# Altium PCB Strommessplatine.PcbDoc
Units mm, origin at the board's own origin, x right, y up, seen from the top; angles counter-clockwise.
Board outline 98 x 97 mm, 2 copper layers (Top Layer, Bottom Layer), stack 1.605 mm thick; 91 components, 55 nets, 253 pads, 53 vias.
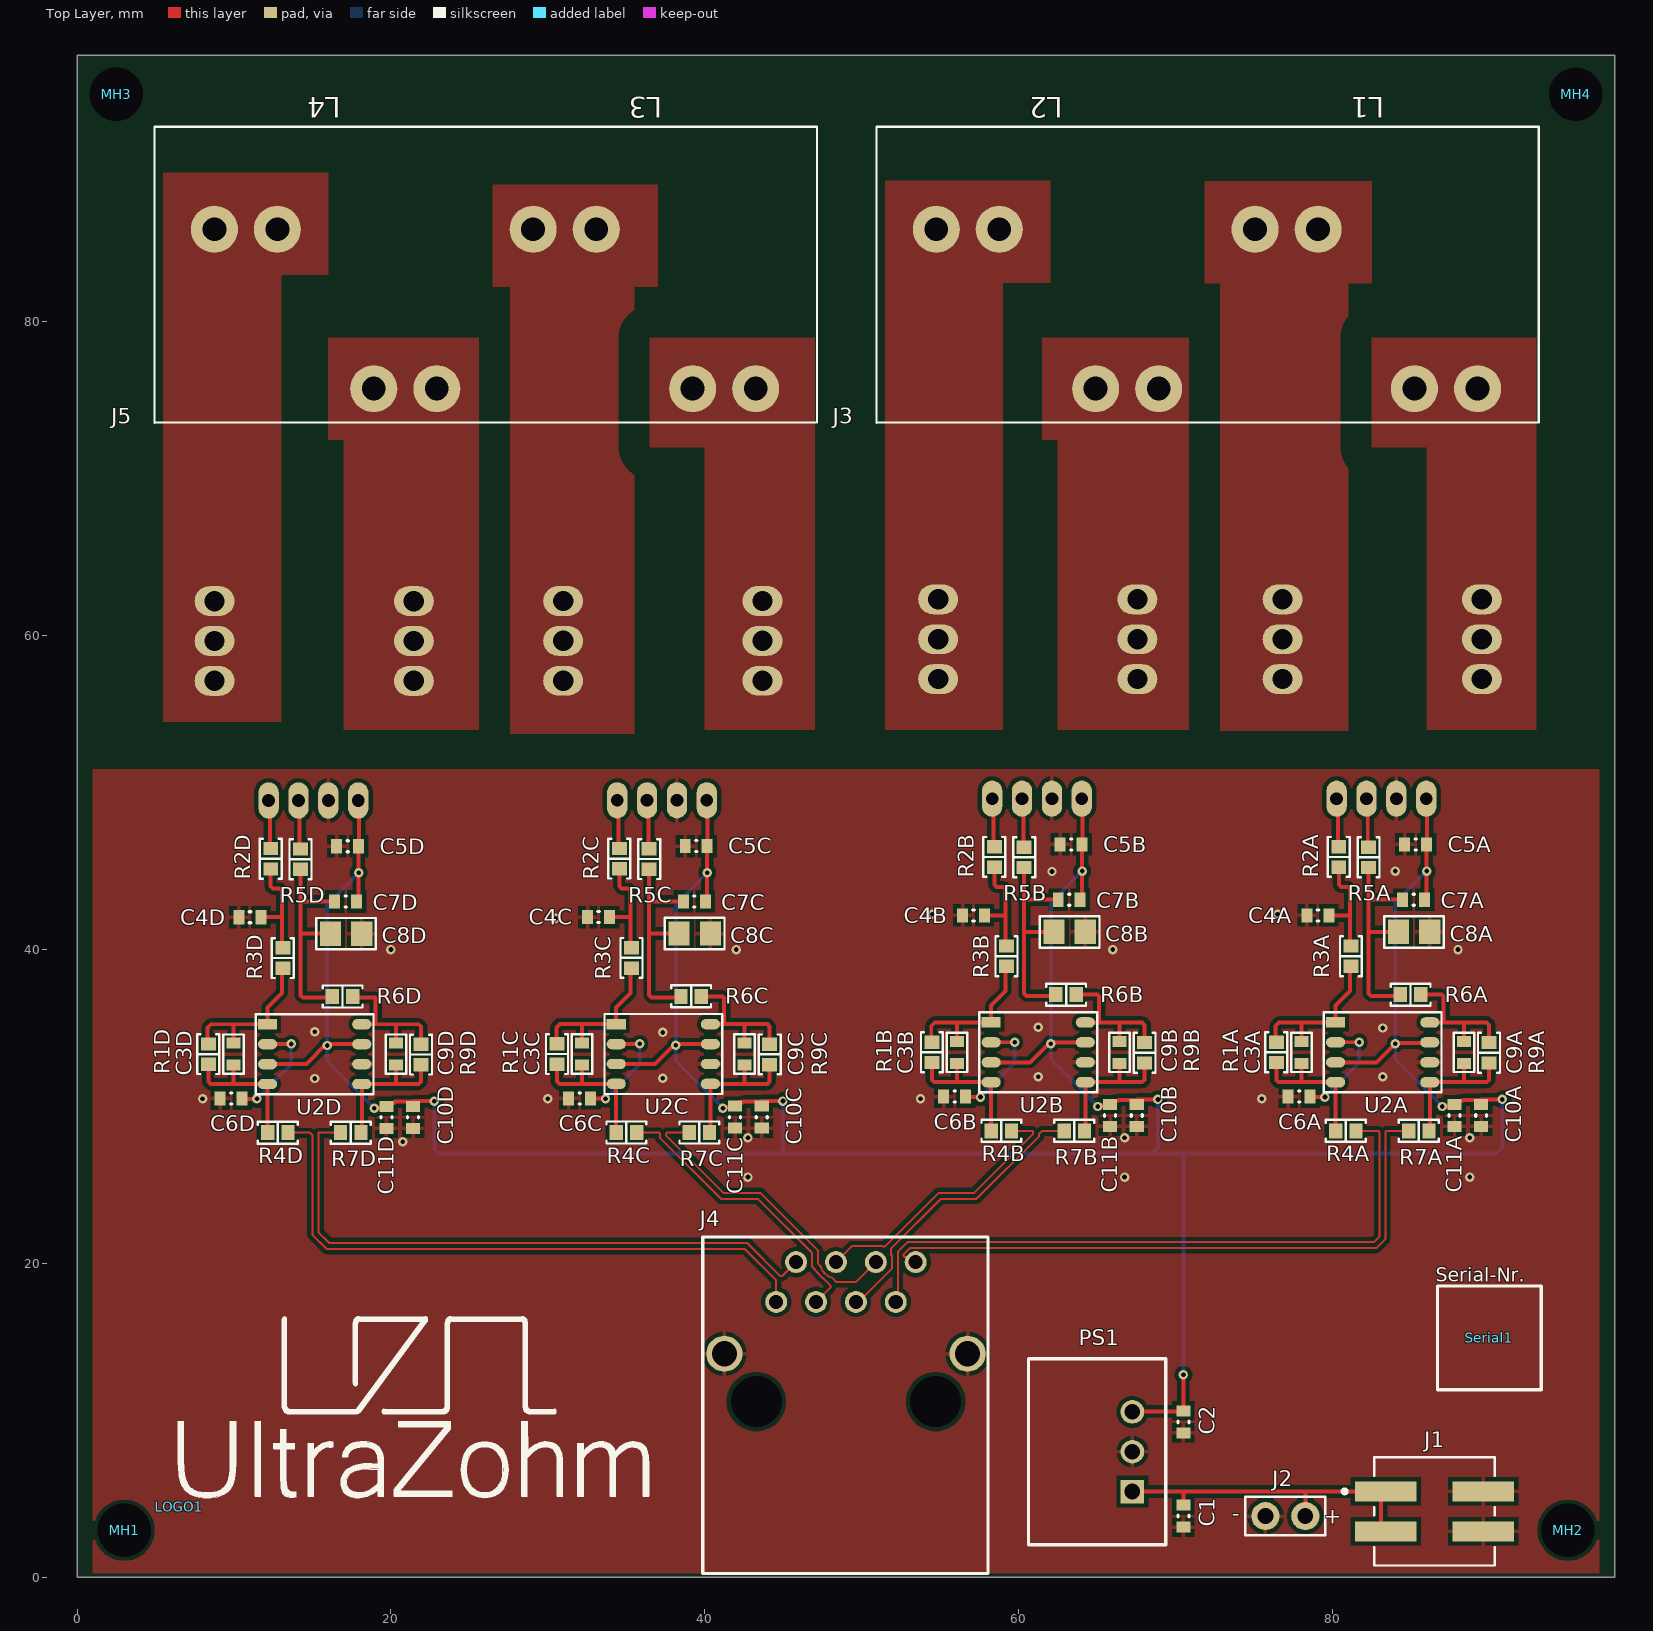
[diagram p0: Top Layer view]
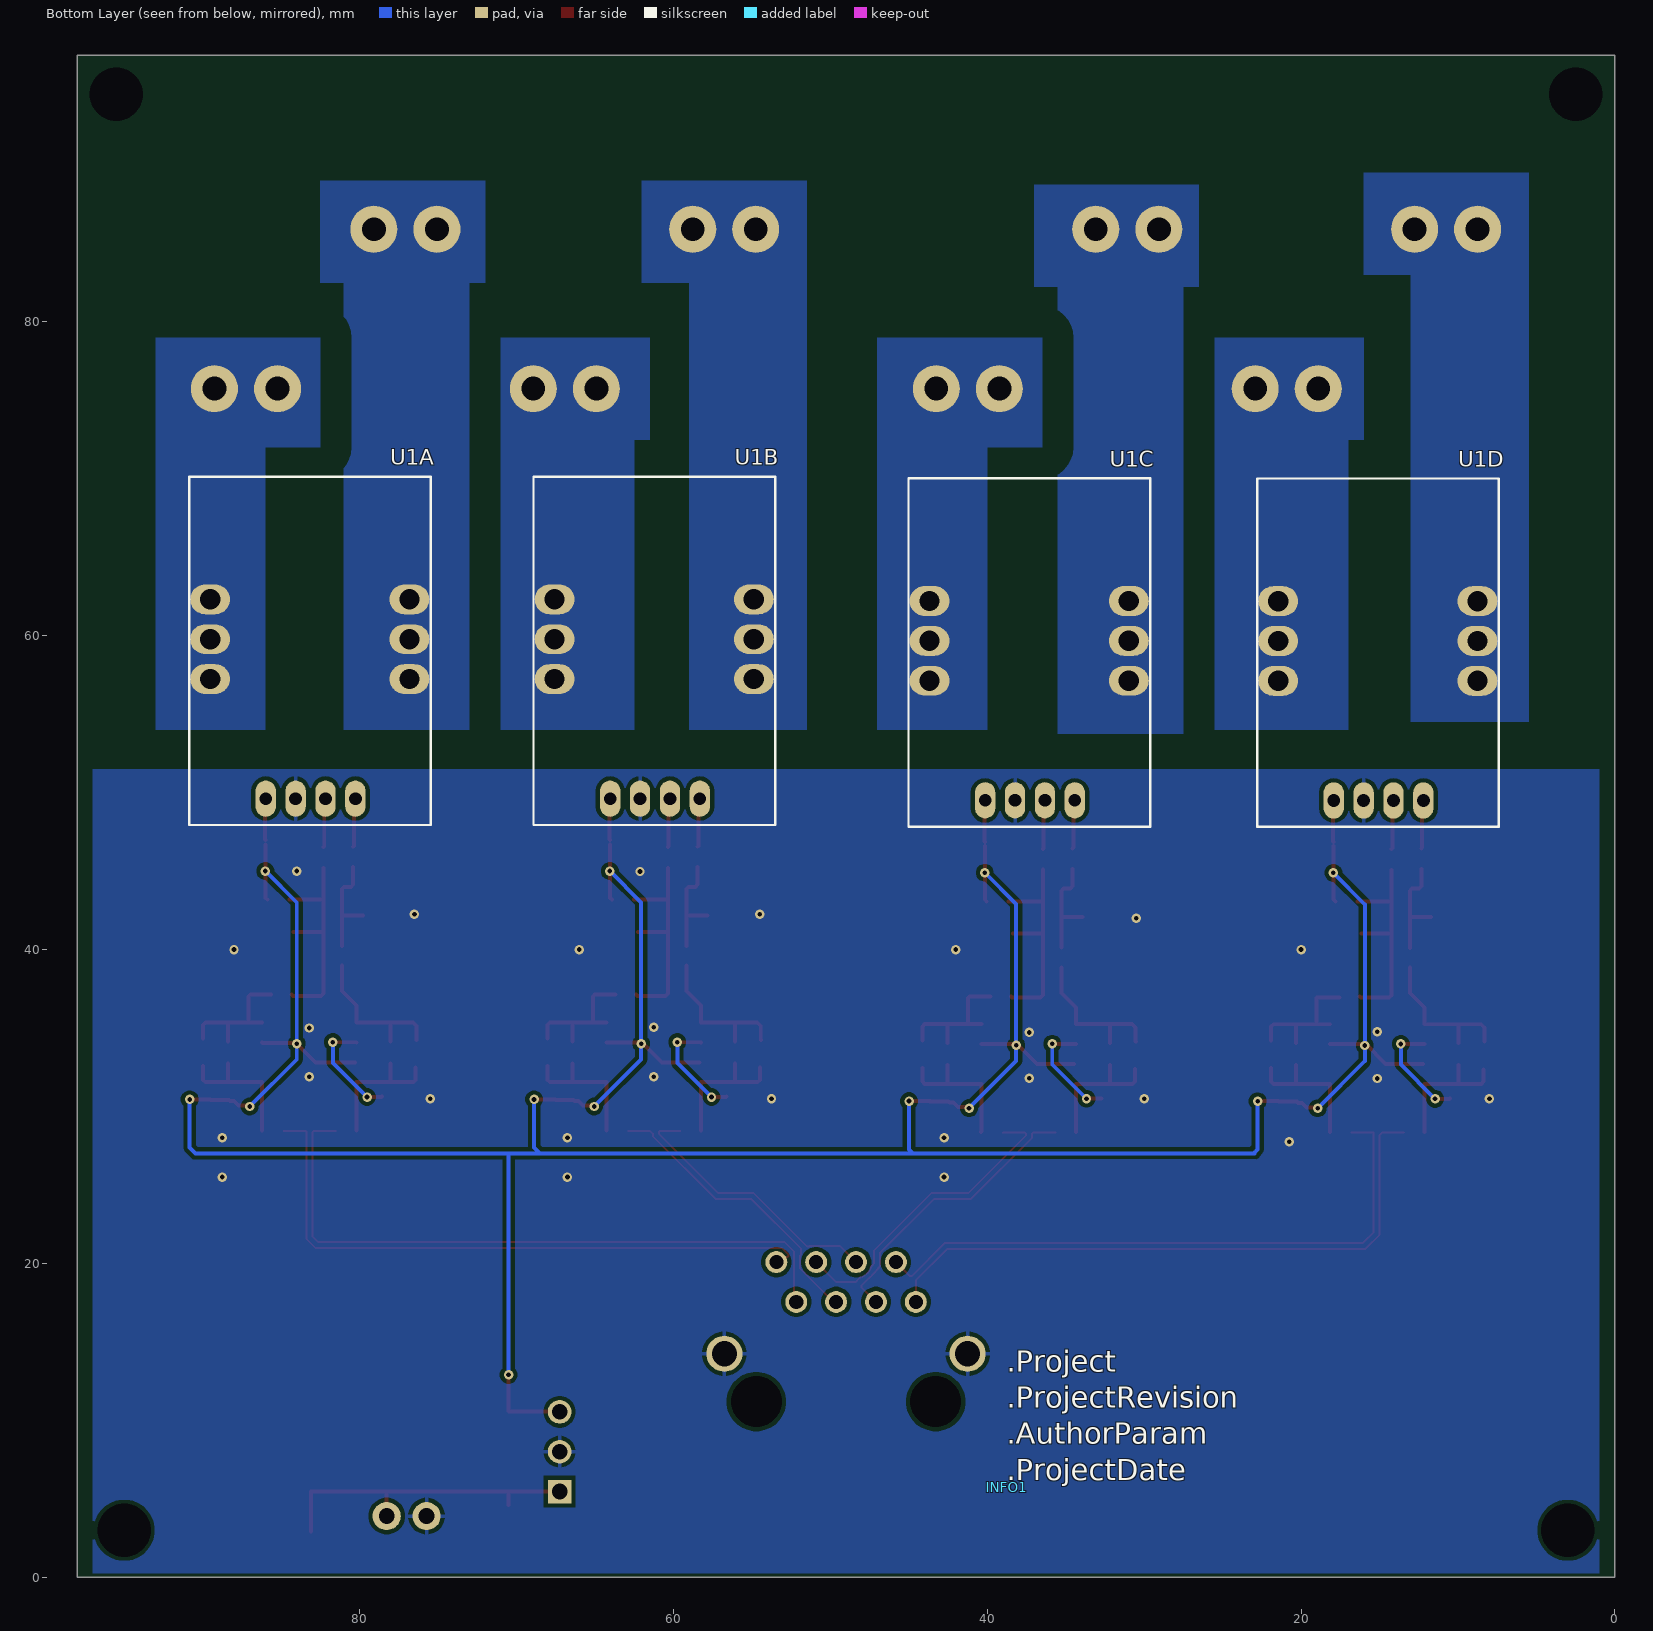
[diagram p1: Bottom Layer view, seen from below]
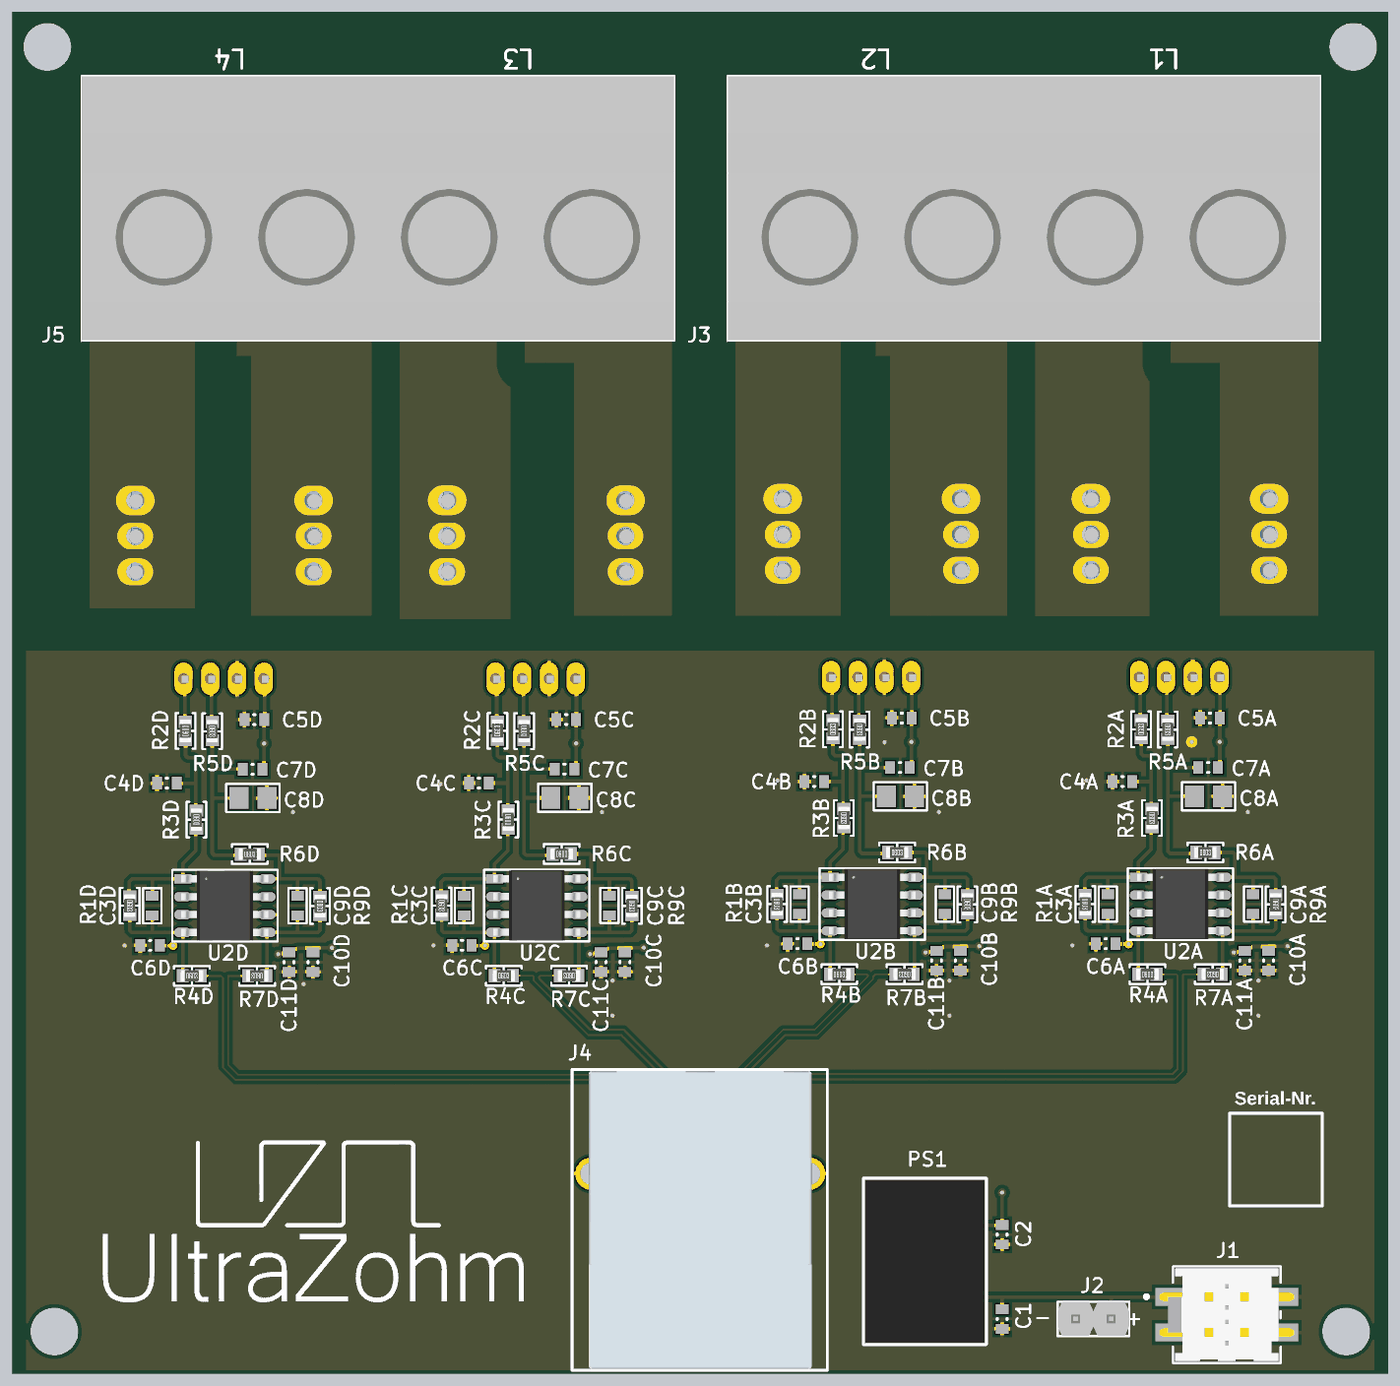
[diagram p2: 3D render of the assembled board from above, using the file's embedded part models]
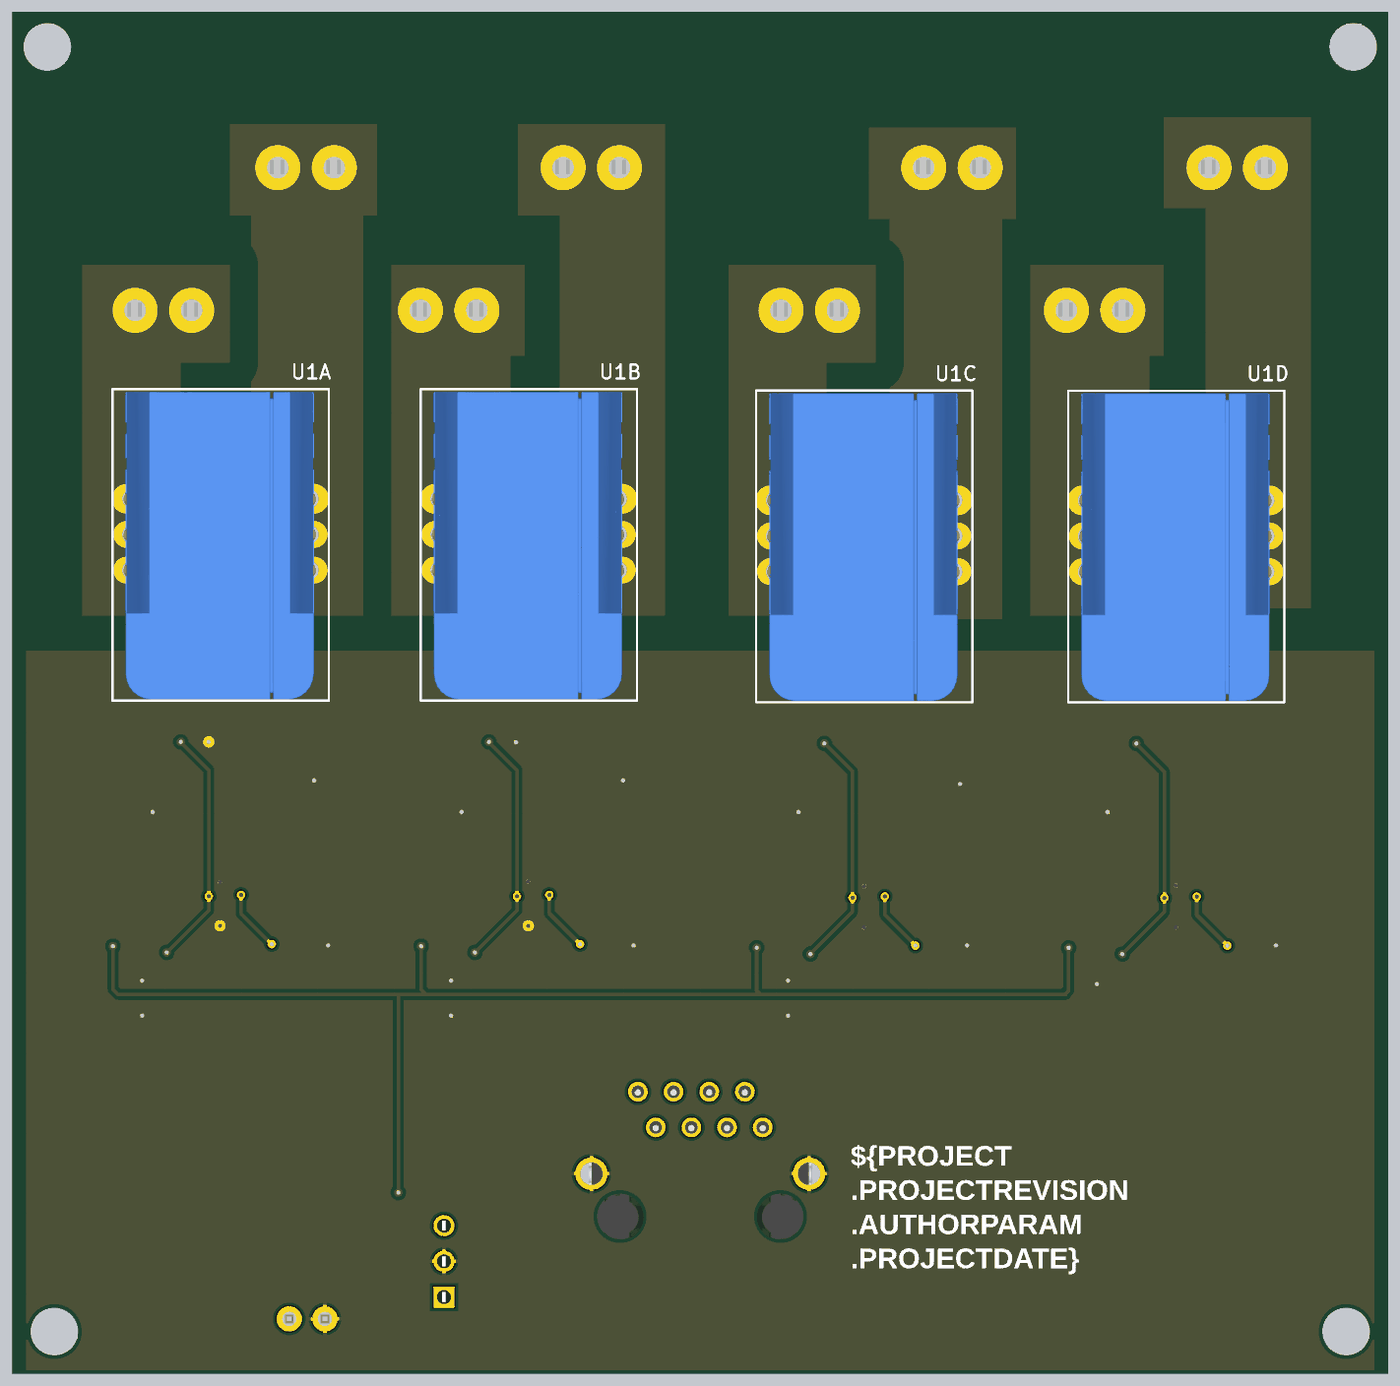
[diagram p3: 3D render of the assembled board from below, using the file's embedded part models]

## Layer stack, top to bottom
Top Solder: solder mask 0.01, Solder Resist, Dk 3.5
Top Layer: signal copper 0.07
Dielectric 1: prepreg 0.1, 2313, Dk 4.3
Core: core 1.265, Kern FR4, Dk 4.3
Dielectric 2: prepreg 0.1, 2313, Dk 4.3
Bottom Layer: signal copper 0.07
Bottom Solder: solder mask 0.01, Solder Resist, Dk 3.5

## Board outline
0,0 0,97 98,97 98,0

## Design rules (kind name [scope] priority, off if disabled: settings)
BoardOutlineClearance [All] p1: gap=0.254 ignorepadtopadclearanceinfootprint=FALSE except(0: Arc-SplitContinuation Track-SplitContinuation SMDPad-SplitContinuation THPad-SplitContinuation Via-SplitContinuation Fill-SplitContinuation Poly-SplitContinuation Region-SplitContinuation Text-SplitContinuation)
Clearance Clearance_Power [InNetClass('Power')] p1: gap=2 ignorepadtopadclearanceinfootprint=FALSE
Clearance Clearance_1 [All] p2: gap=0.254 ignorepadtopadclearanceinfootprint=FALSE except(0: Arc-Hole Track-Hole SMDPad-Hole THPad-Hole Via-Hole Fill-Hole Poly-Hole Region-Hole Text-Hole; 0.127: Arc-Arc Arc-Track Track-Track)
DiffPairsRouting [All] p1: maxlimit=0.254 minlimit=0.127 mostfreqgap=0.254 toplayer_minwidth=0.127 toplayer_maxwidth=0.127 toplayer_prefwidth=0.127 bottomlayer_minwidth=0.127 bottomlayer_maxwidth=0.127 bottomlayer_prefwidth=0.127 maxuncoupledlength=12.7
Height [All] p1: minheight=0 maxheight=40 prefheight=12.7
PolygonConnect PolygonConnect_Power [InNetClass('Power')] p1: connectstyle=Direct reliefconductorwidth=0.254 reliefentries=4 polygonreliefangle="90 Angle" airgapwidth=0.254
PolygonConnect [All] p2: thpad.connectstyle=Relief thpad.reliefconductorwidth=0.254 thpad.reliefentries=4 thpad.polygonreliefangle="90 Angle" thpad.airgapwidth=0.254 smdpad.connectstyle=Relief smdpad.reliefconductorwidth=0.254 smdpad.reliefentries=4 smdpad.polygonreliefangle="90 Angle" smdpad.airgapwidth=0.254 via.connectstyle=Direct via.reliefconductorwidth=0.254 via.reliefentries=4 via.polygonreliefangle="90 Angle" via.airgapwidth=0.254
RoomDefinition CurrentMeasuerment_2 [InComponentClass('CurrentMeasuerment_2')] p1: confinementstyle=ConfineIn formatcopy=TRUE lockcomponents=FALSE outline 51,24 70.8,24 70.8,72.625 51,72.625
RoomDefinition CurrentMeasuerment_4 [InComponentClass('CurrentMeasuerment_4')] p2: confinementstyle=ConfineIn formatcopy=TRUE lockcomponents=FALSE outline 4.893,23.885 24.693,23.885 24.693,72.51 4.893,72.51
RoomDefinition CurrentMeasuerment_3 [InComponentClass('CurrentMeasuerment_3')] p3: confinementstyle=ConfineIn formatcopy=TRUE lockcomponents=FALSE outline 27.107,23.893 46.907,23.893 46.907,72.518 27.107,72.518
RoomDefinition CurrentMeasuerment_1 [InComponentClass('CurrentMeasuerment_1')] p4: confinementstyle=ConfineIn formatcopy=TRUE lockcomponents=FALSE outline 72.95,24 92.75,24 92.75,72.625 72.95,72.625
RoomDefinition U_Spannungswandlung [InComponentClass('U_Spannungswandlung')] p5: confinementstyle=ConfineIn formatcopy=TRUE lockcomponents=FALSE outline 92,16.2 92,0.1 59,0.1 59,16.2
RoutingVias [All] p1: holewidth=0 width=0 viastyle="Through Hole" minholewidth=0 minwidth=0 maxholewidth=0.711 maxwidth=1.27
SolderMaskExpansion [All] p1: expansion=0.102 istentingtop=FALSE
UnRoutedNet [All] p1: checkbadconnections=TRUE
Width [All] p1: maxlimit=10 minlimit=0.127 preferedwidth=0.254 minimp=50.000000 maximp=50.000000 favimp=50.000000
27 further rules are at their usual default settings.

## Classes and differential pairs
net class Power: I1_INPUT I1_OUTPUT I2_INPUT I2_OUTPUT I3_INPUT I3_OUTPUT I4_INPUT I4_OUTPUT
channel class Measurement: CurrentMeasuerment_1 CurrentMeasuerment_2 CurrentMeasuerment_3 CurrentMeasuerment_4
component class U_Spannungswandlung: C1 C2 J1 J2 PS1
component class TopSheet: INFO1 J3 J4 J5 LOGO1 MH1 MH2 MH3 MH4 Serial1
component class CurrentMeasuerment_4: C3D C4D C5D C6D C7D C8D C9D C10D C11D R1D R2D R3D R4D R5D R6D R7D R9D U1D U2D
component class CurrentMeasuerment_3: C3C C4C C5C C6C C7C C8C C9C C10C C11C R1C R2C R3C R4C R5C R6C R7C R9C U1C U2C
component class CurrentMeasuerment_2: C3B C4B C5B C6B C7B C8B C9B C10B C11B R1B R2B R3B R4B R5B R6B R7B R9B U1B U2B
component class CurrentMeasuerment_1: C3A C4A C5A C6A C7A C8A C9A C10A C11A R1A R2A R3A R4A R5A R6A R7A R9A U1A U2A
differential pair I4_OUT: +I4_OUT_P -I4_OUT_N
differential pair I3_OUT: +I3_OUT_P -I3_OUT_N
differential pair I2_OUT: +I2_OUT_P -I2_OUT_N
differential pair I1_OUT: +I1_OUT_P -I1_OUT_N

## Components (designator, comment, footprint, x,y, rotation, side; value= is the part's Value field where it differs from the comment)
C1 "1 µF" C_0603 70.5,3.9 r90 top
C2 "1 µF" C_0603 70.5,9.9 r90 top
C3A "22pF" C0603 78.025,33.45 r90 top (schematic designator C3)
C3B "22pF" C0603 56.075,33.45 r90 top (schematic designator C3)
C3C "22pF" C0603 32.182,33.343 r90 top (schematic designator C3)
C3D "22pF" C0603 9.968,33.335 r90 top (schematic designator C3)
C4A "2.2 nF" C_0603 79.075,42.175 r180 top (schematic designator C4)
C4B "2.2 nF" C_0603 57.125,42.175 r180 top (schematic designator C4)
C4C "2.2 nF" C_0603 33.232,42.068 r180 top (schematic designator C4)
C4D "2.2 nF" C_0603 11.018,42.06 r180 top (schematic designator C4)
C5A "1 µF" C_0603 85.3,46.7 r180 top (schematic designator C5)
C5B "1 µF" C_0603 63.35,46.7 r180 top (schematic designator C5)
C5C "1 µF" C_0603 39.457,46.593 r180 top (schematic designator C5)
C5D "1 µF" C_0603 17.243,46.585 r180 top (schematic designator C5)
C6A "1 µF" C_0603 77.875,30.625 r0 top (schematic designator C6)
C6B "1 µF" C_0603 55.925,30.625 r0 top (schematic designator C6)
C6C "1 µF" C_0603 32.032,30.518 r0 top (schematic designator C6)
C6D "1 µF" C_0603 9.818,30.51 r0 top (schematic designator C6)
C7A "2.2 nF" C_0603 85.175,43.175 r0 top (schematic designator C7)
C7B "2.2 nF" C_0603 63.225,43.175 r0 top (schematic designator C7)
C7C "2.2 nF" C_0603 39.332,43.068 r0 top (schematic designator C7)
C7D "2.2 nF" C_0603 17.118,43.06 r0 top (schematic designator C7)
C8A "82pF" C0805 85.2,41.125 r180 top (schematic designator C8)
C8B "82pF" C0805 63.25,41.125 r180 top (schematic designator C8)
C8C "82pF" C0805 39.357,41.018 r180 top (schematic designator C8)
C8D "82pF" C0805 17.143,41.01 r180 top (schematic designator C8)
C9A "22 pF" C0603 88.375,33.45 r90 top (schematic designator C9)
C9B "22 pF" C0603 66.425,33.45 r90 top (schematic designator C9)
C9C "22 pF" C0603 42.532,33.343 r90 top (schematic designator C9)
C9D "22 pF" C0603 20.318,33.335 r90 top (schematic designator C9)
C10A "100 pF" C_0603 89.475,29.425 r90 top (schematic designator C10)
C10B "100 pF" C_0603 67.525,29.425 r90 top (schematic designator C10)
C10C "100 pF" C_0603 43.632,29.318 r90 top (schematic designator C10)
C10D "100 pF" C_0603 21.418,29.31 r90 top (schematic designator C10)
C11A "0.1 µF" C_0603 87.775,29.425 r90 top (schematic designator C11)
C11B "0.1 µF" C_0603 65.825,29.425 r90 top (schematic designator C11)
C11C "0.1 µF" C_0603 41.932,29.318 r90 top (schematic designator C11)
C11D "0.1 µF" C_0603 19.718,29.31 r90 top (schematic designator C11)
INFO1 "Design Information" Design_info 38.75,5.75 r180 bottom
J1 "IPL1-102-02-L-D-K" FP-IPL1-102-02-L-D-K-0 86.5,4.2 r0 top
J2 "68001-202HLF" 68001-202HLF 77,3.9 r180 top
J3 "39910-0104" 39910-0104 72,83 r90 top
J4 "615008142621" 615008142621 49,11 r0 top
J5 "39910-0104" 39910-0104 26,83 r90 top
LOGO1 "UZ Logo" UZ_Logo_small 6.5,4.5 r0 top value=Logo
MH1 "Mounting Hole" MH_3.4#1 2.5,2.5 r90 top
MH2 "Mounting Hole" MH_3.4#2 95.5,2.5 r90 top
MH3 "Mounting Hole" MH_3.4#3 2.5,94.5 r90 top
MH4 "Mounting Hole" MH_3.4#3 95.5,94.5 r90 top
PS1 "173010578" FDSM_SIP-3 65,8 r90 top value="5 W"
R1A "2k 0.1%" "RES 0603_1608" 76.425,33.45 r270 top value=2k (schematic designator R1)
R1B "2k 0.1%" "RES 0603_1608" 54.475,33.45 r270 top value=2k (schematic designator R1)
R1C "2k 0.1%" "RES 0603_1608" 30.582,33.343 r270 top value=2k (schematic designator R1)
R1D "2k 0.1%" "RES 0603_1608" 8.368,33.335 r270 top value=2k (schematic designator R1)
R2A "27R" "RES 0603_1608" 80.4,45.9 r90 top (schematic designator R2)
R2B "27R" "RES 0603_1608" 58.45,45.9 r90 top (schematic designator R2)
R2C "27R" "RES 0603_1608" 34.557,45.793 r90 top (schematic designator R2)
R2D "27R" "RES 0603_1608" 12.343,45.785 r90 top (schematic designator R2)
R3A "1k 0.1%" "RES 0603_1608" 81.175,39.575 r270 top value=1k (schematic designator R3)
R3B "1k 0.1%" "RES 0603_1608" 59.225,39.575 r270 top value=1k (schematic designator R3)
R3C "1k 0.1%" "RES 0603_1608" 35.332,39.468 r270 top value=1k (schematic designator R3)
R3D "1k 0.1%" "RES 0603_1608" 13.118,39.46 r270 top value=1k (schematic designator R3)
R4A "49R9" "RES 0603_1608" 80.85,28.45 r0 top (schematic designator R4)
R4B "49R9" "RES 0603_1608" 58.9,28.45 r0 top (schematic designator R4)
R4C "49R9" "RES 0603_1608" 35.007,28.343 r0 top (schematic designator R4)
R4D "49R9" "RES 0603_1608" 12.793,28.335 r0 top (schematic designator R4)
R5A "51R" "RES 0603_1608" 82.3,45.875 r270 top (schematic designator R5)
R5B "51R" "RES 0603_1608" 60.35,45.875 r270 top (schematic designator R5)
R5C "51R" "RES 0603_1608" 36.457,45.768 r270 top (schematic designator R5)
R5D "51R" "RES 0603_1608" 14.243,45.76 r270 top (schematic designator R5)
R6A "1k 0.1%" "RES 0603_1608" 84.975,37.125 r0 top value=1k (schematic designator R6)
R6B "1k 0.1%" "RES 0603_1608" 63.025,37.125 r0 top value=1k (schematic designator R6)
R6C "1k 0.1%" "RES 0603_1608" 39.132,37.018 r0 top value=1k (schematic designator R6)
R6D "1k 0.1%" "RES 0603_1608" 16.918,37.01 r0 top value=1k (schematic designator R6)
R7A "49R9" "RES 0603_1608" 85.5,28.45 r180 top (schematic designator R7)
R7B "49R9" "RES 0603_1608" 63.55,28.45 r180 top (schematic designator R7)
R7C "49R9" "RES 0603_1608" 39.657,28.343 r180 top (schematic designator R7)
R7D "49R9" "RES 0603_1608" 17.443,28.335 r180 top (schematic designator R7)
R9A "2k 0.1%" "RES 0603_1608" 89.975,33.425 r270 top value=2k (schematic designator R9)
R9B "2k 0.1%" "RES 0603_1608" 68.025,33.425 r270 top value=2k (schematic designator R9)
R9C "2k 0.1%" "RES 0603_1608" 44.132,33.318 r270 top value=2k (schematic designator R9)
R9D "2k 0.1%" "RES 0603_1608" 21.918,33.31 r270 top value=2k (schematic designator R9)
Serial1 "Serialnumber 6.3 x 6.3 mm" SERIAL_6.3X6.3MM 90,15.25 r0 top value=REV
U1A "CASR15-NP" "CASR X-NP" 83.12,59.775 r0 bottom (schematic designator U1)
U1B "CASR15-NP" "CASR X-NP" 61.17,59.775 r0 bottom (schematic designator U1)
U1C "CASR15-NP" "CASR X-NP" 37.277,59.668 r0 bottom (schematic designator U1)
U1D "CASR15-NP" "CASR X-NP" 15.063,59.66 r0 bottom (schematic designator U1)
U2A "" ADA4940-1ARZ-R7 83.2,33.45 r0 top (schematic designator U2)
U2B "" ADA4940-1ARZ-R7 61.25,33.45 r0 top (schematic designator U2)
U2C "" ADA4940-1ARZ-R7 37.357,33.343 r0 top (schematic designator U2)
U2D "" ADA4940-1ARZ-R7 15.143,33.335 r0 top (schematic designator U2)

## Footprints (in the part's own frame and the unit in brackets; to place one, negate y for a bottom-side part, rotate by r counter-clockwise, add the part's x,y. Pads: shape width x height; smd on the part's side, far side on the other; paste and mask are expansions set on the pad)
39910-0104 [mm]
  round 3 hole 1.52: 1(-7.26,-17.245) 2(-7.26,-13.225) 3(2.9,-7.085) 4(2.9,-3.065) 5(-7.26,3.075) 6(-7.26,7.095) 7(2.9,13.235) 8(2.9,17.245)
  silkscreen extent -9.43,-21.15 9.43,21.06, body extent -9.39,-21.13 9.4,21.03, height 29.72
68001-202HLF [mm]
  round 1.8 hole 1: 1(-1.27,0) 2(1.27,0)
  silkscreen extent -2.55,-1.22 2.55,1.22, body extent -2.54,-1.21 2.54,1.21, height 8.5
615008142621 [mm]
  round 1.4 hole 0.9: A1(-4.45,6.542) A2(-3.18,9.082) A3(-1.91,6.542) A4(-0.64,9.082) A5(0.63,6.542) A6(1.9,9.082) A7(3.17,6.542) A8(4.44,9.082)
  round 1.065 hole 3.25 unplated: MH3(-5.715,0.192) MH4(5.715,0.192)
  round 2.3 hole 1.6: S1(-7.75,3.243) S2(7.75,3.243)
  silkscreen extent -9.12,-10.75 9.05,10.67, body extent -7.94,-10.65 7.94,10.55, height 13.31
ADA4940-1ARZ-R7 [mm]
  rect 1.22x0.663 smd: 1(-3,1.905)
  oval 1.22x0.663 smd: 2(-3,0.635) 3(-3,-0.635) 4(-3,-1.905) 5(3,-1.905) 6(3,-0.635) 7(3,0.635) 8(3,1.905)
  silkscreen extent -3.75,-2.55 3.75,2.55, body extent -3.1,-2.5 3.1,2.5, height 1.76
C0603 [mm]
  rect 0.7x0.9 smd: 1(-0.7,0) 2(0.7,0)
  silkscreen extent -1.25,-0.65 1.25,0.65, body extent -0.87,-0.48 0.88,0.47, height 1
C0805 [mm]
  rect 1.35x1.55 smd: 1(-1,0) 2(1,0)
  silkscreen extent -1.9,-1 1.9,1, body extent -1.1,-0.72 1.1,0.72, height 1.45
C_0603 [mm] "Chip Capacitor, Body 1.6x0.8mm, Height 1.0mm, IPC High Density"
  rect 0.7x0.9 smd: 1(-0.7,0) 2(0.7,0)
  silkscreen extent -0.05,-0.35 0.05,0.35, body extent -0.87,-0.47 0.88,0.48, height 1
"CASR X-NP" [mil]
  oval 100x75 hole 51 mask+0: 1(251.97,100) 2(251.97,0) 9(-248.03,0) 10(-248.03,100)
  oval 100x75 hole 51 mask+4: 3(251.97,-100) 8(-248.03,-100)
  oval 51x91 hole 32: 11(-112.48,400) 12(-37.5,400) 13(37.5,400) 14(112.48,400)
  silkscreen extent -302,-408 305,466, body extent -266,-400 274,463, height 630
Design_info [mm] "Design information about the PCB"
FDSM_SIP-3 [mm] "Fixed Step Down Regulator Module, SIP-3"
  rect 1.5x1.5 hole 1: 1(-2.54,-2.25)
  round 1.5 hole 1: 2(0,-2.25) 3(2.54,-2.25)
  silkscreen extent -5.92,-4.37 5.92,4.38, body extent -5.8,-4.25 5.8,4.25, height 10.55
FP-IPL1-102-02-L-D-K-0 [mm]
  rect 3.94x1.27 smd paste+0 mask+0: 1(-3.11,1.27) 2(-3.11,-1.27) 3(3.11,1.27) 4(3.11,-1.27)
  silkscreen extent -5.85,-3.45 3.84,3.45, body extent -5.18,-3.55 5.18,3.55, height 0.25
MH_3.4#1 [mm]
  round 3.1 hole 3.4 unplated: 1(0.5,-0.5)
MH_3.4#2 [mm]
  round 3.1 hole 3.4 unplated: 1(0.5,0.5)
MH_3.4#3 [mm]
  round 3.1 hole 3.4 unplated: 1(0,0)
"RES 0603_1608" [mm] "Chip Resistor, 2-Leads, Body 1.60x0.80mm, IPC Medium Density"
  rect 0.85x0.95 smd: 1(-0.65,0) 2(0.65,0)
  silkscreen extent -1.27,-0.7 1.27,0.7, body extent -0.8,-0.4 0.8,0.4, height 0.45
SERIAL_6.3X6.3MM [mm]
  silkscreen extent -3.3,-3.3 3.3,3.3
UZ_Logo_small [mm] "logo width 3cm"
  silkscreen extent -0.05,0.57 29.94,12.12

## Part data
C1 C2 C5A C5B C5C C5D: library part JMK107BJ105MA-T, "Capacitor 0603, 6.3 VDC, 1 µF, X7R", Device Package=0603, Manufacturer="Tajyo Yuden", Operating Temperature="-55 - 85°C", Supplier Part Number 1=963-JMK107BJ105MA-T, Tolerance="20 %", Voltage Rating="6.3 VDC", Component Type="Capacitor 0603", ComponentLink1Description=Datasheet, ComponentLink1URL=https://www.mouser.de/datasheet/2/396/mlcc02_e-1307760.pdf, Created from=MGremer, Created On="20.12.2020 13:54:13", Last Updated="20.12.2020 16:43:29", Live Cycle Status=1, Manufacturer Part Number=JMK107BJ105MA-T, Mounting Type=SMD, PartID=48, Series=CC, Stock number="not stored", Supplier 1=Mouser, Type=Capacitor
C3A C3B C3C C3D: library part 06035A220J4T2A, "Capacitor 0603, 50 VDC, 22 pF, NP0", Case Code (Imperial)=0603, Case Code (Metric)=1608, Dielectric=C0G, Manufacturer="Kyocera AVX", Max Operating Temperature=125°C, Min Operating Temperature=-55°C, Package Quantity=4000, Ratings=AEC-Q200, Tolerance=5%, Voltage Rating=50V, Capacitance=22pF, Case/Package=0603, Category="Ceramic Capacitors", ComponentLink1Description=https://datasheet.ciiva.com/5414/cauto-5414630.pdf?src-supplier=Mouser, ComponentLink1URL=https://datasheet.ciiva.com/5414/cauto-5414630.pdf?src-supplier=Mouser, ComponentLink2Description=https://datasheet.ciiva.com/6264/cauto-6264826.pdf?src-supplier=Digi-Key, ComponentLink2URL=https://datasheet.ciiva.com/6264/cauto-6264826.pdf?src-supplier=Digi-Key, Construction=Flat, Contact Plating=Tin,Matte, Depth=0.81mm, Lead Free="Lead Free", Length=1.6mm, Manufacturer Part Number=06035A220J4T2A, Mount="Surface Mount", Packaging="Tape and Reel", Pricing 1="1=0,23930, 10=0,13710, 25=0,13570, 100=0,09300, 250=0,09210, 500=0,06780, 1000=0,05030, 3000=0,04980, 6000=0,02920 (USD)", Radiation Hardening=No, RoHS=Yes, RoHS Compliant=Yes, Series=-, Stock 1=6620, Supplier 1="Arrow Electronics", Supplier Part Number 1=06035A220J4T2A, Termination=SMD/SMT, Thickness=0.035inch, Voltage Rating (DC)=50V, Width=0.032inch
C4A C4B C4C C4D C7A C7B C7C C7D: library part 06035C222JAT2A, "Capacitor 0603, 50 VDC, 2.2 nF, X7R", Device Package=0603, Manufacturer=AVX, Operating Temperature="-55 - 125°C", Supplier Part Number 1=581-06035C222J, Tolerance="5 %", Voltage Rating="50 VDC", Component Type="Capacitor 0603", ComponentLink1Description=Datasheet, ComponentLink1URL=https://www.mouser.de/datasheet/2/40/X7RDielectric-777024.pdf, Created from=MGremer, Created On="20.12.2020 13:54:13", Last Updated="20.01.2021 13:57:36", Live Cycle Status=1, Manufacturer Part Number=06035C222JAT2A, Mounting Type=SMD, PartID=77, Series="MLCC X7R", Stock number="not stored", Supplier 1=Mouser, Type=Capacitor
C6A C6B C6C C6D: library part UMK107AB7105KA-T, "Capacitor 0603, 50 VDC, 1 µF, X7R", Manufacturer Part Number=UMK107AB7105KA-T
C8A C8B C8C C8D: library part C0805X820J5GACAUTO, "Cap Ceramic 82pF 50V C0G 5% SMD 0805 125°C Paper T/R", Manufacturer=KEMET, Category="Ceramic Capacitors", Manufacturer Part Number=C0805X820J5GACAUTO, Pricing 1="1=0,38000, 10=0,27000, 50=0,27000, 100=0,16200, 1000=0,10200, 10000=0,09100 (USD)", RoHS=Yes, RoHS Compliant=Yes, Stock 1=3758, Supplier 1=Mouser
C9A C9B C9C C9D: library part 06035A220J4T2A, "Capacitor 0603, 50 VDC, 22 pF, NP0", Capacitance=22pF, Case Code (Imperial)=0603, Case Code (Metric)=1608, Dielectric=C0G, Manufacturer="Kyocera AVX", Max Operating Temperature=125°C, Min Operating Temperature=-55°C, Package Quantity=4000, Ratings=AEC-Q200, Tolerance=5%, Voltage Rating=50V, Case/Package=0603, Category="Ceramic Capacitors", ComponentLink1Description=https://datasheet.ciiva.com/5414/cauto-5414630.pdf?src-supplier=Mouser, ComponentLink1URL=https://datasheet.ciiva.com/5414/cauto-5414630.pdf?src-supplier=Mouser, ComponentLink2Description=https://datasheet.ciiva.com/6264/cauto-6264826.pdf?src-supplier=Digi-Key, ComponentLink2URL=https://datasheet.ciiva.com/6264/cauto-6264826.pdf?src-supplier=Digi-Key, Construction=Flat, Contact Plating=Tin,Matte, Depth=0.81mm, Lead Free="Lead Free", Length=1.6mm, Manufacturer Part Number=06035A220J4T2A, Mount="Surface Mount", Packaging="Tape and Reel", Pricing 1="1=0,23930, 10=0,13710, 25=0,13570, 100=0,09300, 250=0,09210, 500=0,06780, 1000=0,05030, 3000=0,04980, 6000=0,02920 (USD)", Radiation Hardening=No, RoHS=Yes, RoHS Compliant=Yes, Series=-, Stock 1=6620, Supplier 1="Arrow Electronics", Supplier Part Number 1=06035A220J4T2A, Termination=SMD/SMT, Thickness=0.035inch, Voltage Rating (DC)=50V, Width=0.032inch
C10A C10B C10C C10D: library part 885012006057, "Capacitor 0603, 50 VDC, 100 pF, C0G", Device Package=0603, Manufacturer="Wuerth Elektronik", Operating Temperature="-55 - 125°C", Supplier Part Number 1=710-885012006057, Tolerance="5 %", Voltage Rating="50 VDC", Component Type="Capacitor 0603", ComponentLink1Description=Datasheet, ComponentLink1URL=https://www.mouser.de/datasheet/2/445/885012006057-1727261.pdf, Created from=MGremer, Created On="20.12.2020 13:54:13", Last Updated="20.12.2020 16:24:16", Live Cycle Status=1, Manufacturer Part Number=885012006057, Mounting Type=SMD, PartID=44, Series=WCAP-CSGP, Stock number="not stored", Supplier 1=Mouser, Type=Capacitor
C11A C11B C11C C11D: library part C0603X104K5RAC7411, "Capacitor 0603, 50 VDC, 0.1 µF, X7R", Device Package=0603, LCSC Part Number=C14663, Manufacturer=KEMET, Operating Temperature="-55 - 125°C", Supplier Part Number 1=80-C0603X104K5R7411, Tolerance="10 %", Voltage Rating="50 VDC", Component Type="Capacitor 0603", ComponentLink1Description=Datasheet, ComponentLink1URL=https://www.mouser.de/datasheet/2/212/1/KEM_C1013_X7R_FT_CAP_SMD-1103280.pdf, Created from=MGremer, Created On="20.12.2020 13:54:13", Last Updated="04.03.2021 09:24:28", Live Cycle Status=1, Manufacturer Part Number=C0603X104K5RAC7411, Mounting Type=SMD, PartID=3, Series="SMD Comm X7R Flex", Stock number="Labor SMD Container", Supplier 1=Mouser, Supplier 2=LCSC, Supplier Part Number 2=C14663, Type=Capacitor
INFO1: "Design InformationS", Manufacturer=UltraZohm, Supplier Part Number 1=-, Component Type="Design Information", ComponentLink1Description=https://docs.ultrazohm.com/, ComponentLink1URL=homepage, Created from=MGremer, Created On="03.11.2021 09:04:23", Last Updated="03.11.2021 09:28:34", Live Cycle Status=1, Manufacturer Part Number="Design Information", PartID=12, Supplier 1=-, Type="Design Information"
J1: ".100\" Mini Mate® Isolated Power Terminal Header", Color=Natural, Manufacturer=Samtec, Max Current Rating=7.4A, Max Operating Temperature=125°C, Min Operating Temperature=-55°C, Category="Headers and Wire Housings", ComponentLink1Description=https://datasheet.ciiva.com/739/ipl1-1xx-xx-xxx-d-xx-x-mkt-739345.pdf?src-supplier=Digi-Key, ComponentLink1URL=https://datasheet.ciiva.com/739/ipl1-1xx-xx-xxx-d-xx-x-mkt-739345.pdf?src-supplier=Digi-Key, ComponentLink2Description=https://datasheet.ciiva.com/14488/ipl1-14488233.pdf?src-supplier=Farnell, ComponentLink2URL=https://datasheet.ciiva.com/14488/ipl1-14488233.pdf?src-supplier=Farnell, Connector Type=Rectangular, Contact Material=Bronze, Contact Mating Length=0.215inch, Contact Plating=Gold, Contact Type="Male Pin", Depth=9.58mm, Fastening Type=Ramp, Gender=Male, Housing Material=Polymer, Length=6.6mm, Manufacturer Part Number=IPL1-102-02-L-D-K, Mount="Surface Mount", Number of Contacts=4, Number of Ports=1, Number of Positions=4, Number of Rows=2, Number of Terminals/Pins=4, Orientation=Straight, Packaging=Rail/Tube, Pitch=2.54mm, Pricing 1="1=4,26000, 50=3,48000, 100=2,95000 (USD)", Radiation Hardening=No, REACH SVHC="No SVHC", RoHS=Yes, RoHS Compliant=Yes, Row Spacing=0.1inch, Series="Mini Mate® IPL1", Stock 1=87, Supplier 1="Arrow Electronics", Termination=Solder
J2: "Conn Unshrouded Header HDR 2 POS 2.54mm Solder ST Top Entry Thru-Hole BergStik® Bulk", Manufacturer="Amphenol ICC / FCI", Category="Headers and Wire Housings", ComponentLink1Description=http://uk.rs-online.com/webdocs/1450/0900766b81450c61.pdf?src-supplier=RSComponents, ComponentLink1URL=http://uk.rs-online.com/webdocs/1450/0900766b81450c61.pdf?src-supplier=RSComponents, ComponentLink2Description=https://cdn.amphenol-icc.com/media/wysiwyg/files/drawing/68000.pdf?src-supplier=Digi-Key, ComponentLink2URL=https://cdn.amphenol-icc.com/media/wysiwyg/files/drawing/68000.pdf?src-supplier=Digi-Key, ComponentLink3Description=http://www.farnell.com/datasheets/1914865.pdf?src-supplier=Newark, ComponentLink3URL=http://www.farnell.com/datasheets/1914865.pdf?src-supplier=Newark, ComponentLink4Description=https://www.alliedelec.com/m/d/f866699523b3cedee69b8cd6f03387a4.pdf?src-supplier=Allied+Electronics, ComponentLink4URL=https://www.alliedelec.com/m/d/f866699523b3cedee69b8cd6f03387a4.pdf?src-supplier=Allied+Electronics, ComponentLink5Description=http://www.mouser.com/ds/2/154/68000-274373.pdf?src-supplier=Mouser, ComponentLink5URL=http://www.mouser.com/ds/2/154/68000-274373.pdf?src-supplier=Mouser, ComponentLink6Description=http://portal.fciconnect.com/Comergent/fci/drawing/68000.pdf?src-supplier=Avnet, ComponentLink6URL=http://portal.fciconnect.com/Comergent/fci/drawing/68000.pdf?src-supplier=Avnet, ComponentLink7Description=http://components.arrow.com/part/dataview/41914267S7424571N8314?src-supplier=Arrow+Electronics, ComponentLink7URL=http://components.arrow.com/part/dataview/41914267S7424571N8314?src-supplier=Arrow+Electronics, Manufacturer Part Number=68001-202HLF, Pricing 1="1=0,27000, 10=0,20700, 50=0,20700, 100=0,16400, 500=0,15700, 1000=0,12800, 2000=0,11700, 5000=0,11000, 10000=0,10600 (USD)", RoHS=No, Stock 1=20846, Supplier 1=Mouser
J3 J5: "10.16mm Beau Eurostyle Fixed Mount PCB Terminal Block High Voltage High Power 60A 4 Circuits", Manufacturer=Molex, Supplier Part Number 1=WM5966-ND, Category="Terminal Blocks", ComponentLink1Description=https://datasheet.ciiva.com/5187/0399100104-terminal-blocks-167725-5187186.pdf?src-supplier=Mouser, ComponentLink1URL=https://datasheet.ciiva.com/5187/0399100104-terminal-blocks-167725-5187186.pdf?src-supplier=Mouser, Manufacturer Part Number=39910-0104, Pricing 1="1=14,50000, 10=12,75600, 25=12,03160, 50=11,45160, 100=11,23410, 250=9,78456, 500=9,42218, 1000=9,05979 (USD)", RoHS=Yes, Stock 1=845, Supplier 1=Digi-Key
J4: "WR-MJ; Cat5 RJ45 Modular Jack Socket; STP; Horizontal; PCB Mount 615008 Series", Current Rating=1.5A, Flammability Rating="UL94 V-0", Insulation Resistance=500MR, Manufacturer="Wurth Electronics", Max Operating Temperature=85°C, Min Operating Temperature=-40°C, Package Quantity=80, Supplier Part Number 1=8183327, Voltage Rating (AC)=120V, Category=Connectors, ComponentLink1Description=https://datasheet.ciiva.com/685/615008142621-685839.pdf?src-supplier=Digi-Key, ComponentLink1URL=https://datasheet.ciiva.com/685/615008142621-685839.pdf?src-supplier=Digi-Key, Connector Type=Jack, Contact Material="Copper Alloy", Contact Plating=Gold, Direction=Down, Gender=Female, Housing Material=PBT, Manufacturer Part Number=615008142621, Mount="Through Hole", Number of Pins=8, Number of Ports=1, Number of Positions=8, Number of Rows=1, Packaging=Tray, Pricing 1="1=3,00600, 15=2,69900, 50=2,40500, 100=2,24500, 250=2,11100 (USD)", RoHS=Yes, RoHS Compliant=Yes, Series=WR_COM, Shielding=Shielded, Stock 1=1, Supplier 1=RSComponents, Termination="Through Hole", Weight=0.204589oz
LOGO1: library part "Logo small", Manufacturer=UltraZohm, Supplier Part Number 1=-, Component Type=Logo, ComponentLink1Description=https://docs.ultrazohm.com/, ComponentLink1URL=homepage, Created=Jan2021_Liegmann, Created from=MGremer, Created On="03.11.2021 09:04:23", Last Updated="03.11.2021 09:05:50", Live Cycle Status=1, Manufacturer Part Number="Logo small", PartID=10, Supplier 1=-, Type=Logo
MH1 MH2 MH3 MH4: Device Package=-, Component Type="Mounting Hole", ComponentLink1Description=Datasheet, Created from=MHlatky, Created On="26.01.2021 09:19:51", Last Updated="21.03.2022 23:05:12", Live Cycle Status=1, Manufacturer="Mounting Hole", Manufacturer Part Number="Mounting Hole", PartID=16, Stock number="not stored", Supplier 1="Mounting Hole", Supplier Part Number 1="Mounting Hole", Type="Mounting Hole"
PS1: "Not isolated DCDC Converter 5 V Output, 1 A, 8 - 28 V Input", Device Package=FDSM, Manufacturer="Wuerth Elektronik", Supplier Part Number 1=710-173010578, Component Type="Not isolated DCDC Converter", ComponentLink1Description=Datasheet, ComponentLink1URL=https://www.mouser.de/datasheet/2/445/173010578-1716125.pdf, Created from=MGremer, Created On="06.01.2021 09:48:37", Last Updated="06.05.2021 06:17:55", Live Cycle Status=1, Manufacturer Part Number=173010578, Mounting Type=THT, PartID=11, Series=MagI3C-FDSM, Stock number="not stored", Supplier 1=Mouser, Type="not isolated DCDC converter"
R1A R1B R1C R1D R9A R9B R9C R9D: library part ERA-3VEB2001V, "SMD resistor 0.1%", Device Package=0603, Manufacturer=Panasonic, Supplier Part Number 1=667-ERA-3VEB2001V, Component Type="SMD resistor", ComponentLink1Description=Datasheet, ComponentLink1URL=https://www.mouser.de/datasheet/2/315/Panasonic_Resistor_Thin_Film_(ERA-xV_2c_ERA-xK_Ser-1815278.pdf, Created from=MGremer, Created On="14.12.2020 16:17:14", Last Updated="02.03.2021 14:07:32", Live Cycle Status=1, Manufacturer Part Number=ERA-3VEB2001V, Mounting Type=SMD, PartID=187, Stock number="not stored", Supplier 1=Mouser, Type=Resistor
R2A R2B R2C R2D: library part RK73B1JTTDD270J, "SMD resistor E24 series", Device Package=0603, Manufacturer="KOA Speer", Supplier Part Number 1=660-RK73B1JTTDD270J, Tolerance=5%, Component Type="SMD resistor", ComponentLink1Description=Datasheet, ComponentLink1URL=https://www.mouser.de/datasheet/2/219/RK73B-1825463.pdf, Created from=MGremer, Created On="14.12.2020 16:17:14", Last Updated="02.03.2021 14:07:32", Live Cycle Status=1, Manufacturer Part Number=RK73B1JTTDD270J, Mounting Type=SMD, PartID=36, Stock number="Labor SMD Container", Supplier 1=Mouser, Type=Resistor
R3A R3B R3C R3D R6A R6B R6C R6D: library part PCF-W0603LF-03-1001-B-P-LT, "SMD resistor 0.1%", Device Package=0603, Manufacturer="IRC / TT Electronics", Supplier Part Number 1=66-PCFW0603LF031001B, Component Type="SMD resistor", ComponentLink1Description=Datasheet, ComponentLink1URL=https://www.mouser.de/datasheet/2/414/PCF-1528243.pdf, Created from=MGremer, Created On="14.12.2020 16:17:14", Last Updated="02.03.2021 14:07:32", Live Cycle Status=1, Manufacturer Part Number=PCF-W0603LF-03-1001-B-P-LT, Mounting Type=SMD, PartID=163, Stock number="not stored", Supplier 1=Mouser, Type=Resistor
R4A R4B R4C R4D R7A R7B R7C R7D: library part RN73H1JTTD49R9F100, "SMD resistor 1%", Device Package=0603, LCSC Part Number=C23185, Manufacturer="KOA Speer", Supplier Part Number 1=660-RN73H1JT49R9F100, Tolerance=1%, Component Type="SMD resistor", ComponentLink1Description=Datasheet, ComponentLink1URL=https://www.mouser.de/datasheet/2/219/RN73H-1843478.pdf, Created from=MGremer, Created On="14.12.2020 16:17:14", Last Updated="27.05.2022 13:46:35", Live Cycle Status=1, Manufacturer Part Number=RN73H1JTTD49R9F100, Mounting Type=SMD, PartID=189, Stock number="not stored", Supplier 1=Mouser, Type=Resistor
R5A R5B R5C R5D: library part RK73B1JTTDD510J, "SMD resistor E24 series", Device Package=0603, Manufacturer="KOA Speer", Supplier Part Number 1=660-RK73B1JTTDD510J, Tolerance=5%, Component Type="SMD resistor", ComponentLink1Description=Datasheet, ComponentLink1URL=https://www.mouser.de/datasheet/2/219/RK73B-1825463.pdf, Created from=MGremer, Created On="14.12.2020 16:17:14", Last Updated="03.03.2021 10:53:30", Live Cycle Status=1, Manufacturer Part Number=RK73B1JTTDD510J, Mounting Type=SMD, PartID=43, Stock number="Labor SMD Container", Supplier 1=Mouser, Type=Resistor
Serial1: library part "Serial Number", "Serial Number", Manufacturer=UltraZohm, Supplier Part Number 1=-, Component Type="Serial Number", ComponentLink1Description=https://docs.ultrazohm.com/, ComponentLink1URL=homepage, Created=2018_09_18_AGeiger, Created from=MGremer, Created On="03.11.2021 09:04:23", Last Updated="03.11.2021 09:28:34", Live Cycle Status=1, Manufacturer Part Number="Serial Number", PartID=11, Supplier 1=-, Type="Serial Number"
U1A U1B U1C U1D: "Sensor Current Flux 15A Ac/dc", Case/Package=Module, Current Sensing=15A, Frequency=300kHz, Manufacturer=LEM, Max Operating Temperature=85°C, Max Supply Current=20mA, Max Supply Voltage (DC)=5.25V, Min Operating Temperature=-40°C, Min Supply Voltage (DC)=4.75V, Package Quantity=50, Supplier Part Number 1=398-1092-ND, Accuracy=0.8%, Category="Current Sensors", ComponentLink1Description=https://datasheet.ciiva.com/2812/casrseries-2812487.pdf?src-supplier=Digi-Key, ComponentLink1URL=https://datasheet.ciiva.com/2812/casrseries-2812487.pdf?src-supplier=Digi-Key, Linearity=1%, Manufacturer Part Number=CASR15-NP, Mount="Through Hole,PCB", Number of Channels=1, Operating Supply Voltage=5.25V, Overall Depth=13.4mm, Overall Height=16.5mm, Packaging=Rail/Tube, Polarity=Bidirectional, Pricing 1="1=17,07000, 5=16,72600, 10=13,93800, 25=12,89280, 50=12,54420, 100=10,80200, 450=10,10504, 950=9,58238 (USD)", REACH SVHC="No SVHC", Response Time=0.3us, RoHS=Yes, RoHS Compliant=Yes, Sensitivity=41.67mV/A, Series=CASR, Stock 1=548, Supplier 1=Digi-Key
U2A U2B U2C U2D: library part ADA4940-1ARZ, "IC OPAMP DIFF 260MHZ 8SOIC", Case/Package=SOIC, Input Bias Current=1.1uA, Input Offset Voltage (Vos)=60uV, Input Resistance=50MR, Manufacturer="Analog Devices", Max Operating Temperature=125°C, Max Supply Current=13.5uA, Max Supply Voltage=6V, Min Operating Temperature=-40°C, Min Supply Voltage=3V, Nominal Supply Current=1.25mA, Operating Supply Current=1.18mA, Operating Supply Voltage=5V, Output Current per Channel=46mA, Package Quantity=98, Power Supply Rejection Ratio (PSRR)=80dB, Supplier Part Number 1=584-ADA4940-1ARZ, Test Frequency=50kHz, -3db Bandwidth=260MHz, Amplifier Type=DIFFERENTIAL, Bandwidth=260MHz, Category="Amplifiers - Op Amps, Buffer, Instrumentation", Common Mode Rejection Ratio=86dB, ComponentLink1Description=https://datasheet.ciiva.com/1578/ada4940-1-4940-2-1578032.pdf?src-supplier=Newark, ComponentLink1URL=https://datasheet.ciiva.com/1578/ada4940-1-4940-2-1578032.pdf?src-supplier=Newark, ComponentLink2Description=https://datasheet.ciiva.com/15129/getdatasheetpartid-486836-15129044.pdf?src-supplier=Verical, ComponentLink2URL=https://datasheet.ciiva.com/15129/getdatasheetpartid-486836-15129044.pdf?src-supplier=Verical, ComponentLink3Description=https://datasheet.ciiva.com/1485/1790104-1485202.pdf?src-supplier=Element14, ComponentLink3URL=https://datasheet.ciiva.com/1485/1790104-1485202.pdf?src-supplier=Element14, ComponentLink4Description=https://datasheet.ciiva.com/8036/1790104-8036687.pdf?src-supplier=Element14, ComponentLink4URL=https://datasheet.ciiva.com/8036/1790104-8036687.pdf?src-supplier=Element14, ComponentLink5Description=https://datasheet.ciiva.com/2965/ada4940-1-4940-2-2965446.pdf?src-supplier=Avnet, ComponentLink5URL=https://datasheet.ciiva.com/2965/ada4940-1-4940-2-2965446.pdf?src-supplier=Avnet, ComponentLink6Description=https://datasheet.ciiva.com/1808/ada4940-1-4940-2-1808830.pdf?src-supplier=Digi-Key, ComponentLink6URL=https://datasheet.ciiva.com/1808/ada4940-1-4940-2-1808830.pdf?src-supplier=Digi-Key, Contact Plating=Tin,Matte, Gain Bandwidth Product=260MHz, Height=1.5mm, Lead Free="Contains Lead", Length=5mm, Manufacturer Part Number=ADA4940-1ARZ, Number of Amplifiers=1, Number of Channels=1, Number of Circuits=1, Number of Elements=1, Number of Pins=8, Packaging=Rail/Tube, Pricing 1="1=5,14000, 10=4,62000, 50=4,37000, 100=3,78000, 1000=3,21000, 10000=2,74000 (USD)", Quiescent Current=1.18mA, Radiation Hardening=No, REACH SVHC="No SVHC", RoHS=Yes, RoHS Compliant=Yes, Series=-, Settling Time=34ns, Slew Rate=95V/µs, Stock 1=3938, Supplier 1=Mouser, Supply Current=1.25mA, Width=4mm

## Via types
v1: diameter 0.6, hole 0.3, Top Layer to Bottom Layer, tented both sides, 38 vias
v2: diameter 0.6, hole 0.3, Top Layer to Bottom Layer, 15 vias

## Nets (pads, with @x,y where several pads share a name; then routed paths per layer and width w, separated by ;. In a path a pad name is that pad's centre, name@x,y a point inside that pad or via, vN(x,y) a via of type N, cw(c..) or ccw(c..) an arc to the next point about the centre after c; other vN are vias at no path point)
5V: C2.2 C5A.1 C5B.1 C5C.1 C5D.1 C7A.2 C7B.2 C7C.2 C7D.2 C10A.2 C10B.2 C10C.2 C10D.2 C11A.2 C11B.2 C11C.2 C11D.2 PS1.3 U1A.14 U1B.14 U1C.14 U1D.14 U2A.3 U2A.7 U2B.3 U2B.7 U2C.3 U2C.7 U2D.3 U2D.7 | length 236.1
  Top Layer w0.254: U2D.3@12.243,32.7 14.608,32.7 15.878,33.97 U2D.7 ; C7D.2 17.943,43.185 v1(17.943,44.885) C5D.1 ; C5D.1@17.943,46.86 17.971,46.889 17.971,49.471 U1D.14@18,49.5 ; v1(18.943,29.885) 19.005,29.948 19.655,29.948 C11D.2 19.941,30.233 20.185,30.233 20.262,30.31 21.418,30.31 21.443,30.335 v1(22.768,30.335) ; U2C.3@34.457,32.708 36.822,32.708 38.092,33.978 U2C.7 ; C7C.2 40.157,43.193 v1(40.157,44.893) C5C.1 ; C5C.1@40.157,46.868 40.185,46.896 40.185,49.479 U1C.14@40.214,49.508 ; v1(41.157,29.893) 41.219,29.956 41.869,29.956 C11C.2 42.155,30.241 42.399,30.241 42.476,30.318 43.632,30.318 43.657,30.343 v1(44.982,30.343) ; U2B.3@58.35,32.815 60.715,32.815 61.985,34.085 U2B.7 ; C7B.2 64.05,43.3 v1(64.05,45) C5B.1 ; C5B.1@64.05,46.975 64.078,47.003 64.078,49.586 U1B.14@64.107,49.615 ; v1(65.05,30) 65.112,30.063 65.762,30.063 C11B.2 66.048,30.348 66.292,30.348 66.369,30.425 67.525,30.425 67.55,30.45 v1(68.875,30.45) ; PS1.3 67.28,10.57 70.47,10.57 C2.2 ; C2.2@70.5,10.7 v1(70.5,12.9) ; U2A.3@80.3,32.815 82.815,32.815 84.042,34.042 86.157,34.042 U2A.7 ; C7A.2 86,43.3 v1(86,45) C5A.1 ; C5A.1@86,46.975 86.028,47.003 86.028,49.586 U1A.14@86.057,49.615 ; v1(87,30) 87.062,30.063 87.712,30.063 C11A.2 87.998,30.348 88.242,30.348 88.319,30.425 89.475,30.425 89.5,30.45 v1(90.825,30.45)
  Bottom Layer w0.254: v1(17.943,44.885) 15.943,42.885 v2(15.943,33.885) 15.943,32.885 v1(18.943,29.885) ; v1(22.768,30.335) 22.768,27.259 22.975,27.052 22.975,27.011 44.726,27.011 ; v1(40.157,44.893) 38.157,42.893 v2(38.157,33.893) 38.157,32.893 v1(41.157,29.893) ; v1(44.982,30.343) 44.982,27.267 44.726,27.011 ; v1(64.05,45) 62.05,43 v2(62.05,34) 62.05,33 v1(65.05,30) ; v1(68.875,30.45) 68.875,27.374 68.512,27.011 ; v1(70.5,12.9) 70.5,27.011 ; v1(86,45) 84,43 v2(84,34) 84,33 v1(87,30) ; v1(90.825,30.45) 90.825,27.374 90.462,27.011 70.5,27.011 ; 44.726,27.011 68.512,27.011 ; 68.512,27.011 70.5,27.011
24V: C1.2 J1.1 J1.2 J2.1 PS1.1 | length 21.2
  Top Layer w0.254: PS1.1 70.5,5.46 ; C1.2 70.5,5.46 ; J2.1@77.97,3.9 J2.1@78.149,3.721 ; J2.1@78.2,3.97 J2.1 78.27,5.39 78.2,5.46 ; J1.2@83.09,2.93 83.09,5.47 83.08,5.46 78.2,5.46 ; 70.5,5.46 78.2,5.46
GND: C1.1 C2.1 C4A.2 C4B.2 C4C.2 C4D.2 C5A.2 C5B.2 C5C.2 C5D.2 C6A.1 C6B.1 C6C.1 C6D.1 C8A.1 C8B.1 C8C.1 C8D.1 C10A.1 C10B.1 C10C.1 C10D.1 C11A.1 C11B.1 C11C.1 C11D.1 J1.3 J1.4 J2.2 J4.S1 J4.S2 PS1.2 U1A.13 U1B.13 U1C.13 U1D.13 U2A.6 U2B.6 U2C.6 U2D.6
  other v1: 42.75,25.5 66.75,25.5 88.75,25.5 20.75,27.75 42.75,28 66.75,28 88.75,28 8,30.5 30,30.5 53.75,30.5 75.5,30.5 15.143,31.785 37.332,31.793 37.332,34.718 15.143,34.76 83.2,35 61.25,35.05 20,40 42,40 66,40 88,40 30.5,42 54.5,42.25 76.5,42.25 62.125,44.975
  other v2: 61.25,31.9 83.2,31.9 84,45
I1_INPUT: J3.1 J3.2 U1A.1 U1A.2 U1A.3
I1_OUT_N: J4.A8 R7A.2 | length 40.5
  Top Layer w0.127: J4.A8 53.096,20.082 52.776,20.402 52.754,20.402 52.679,20.476 52.679,20.581 53.071,20.973 82.796,20.973 83.365,21.542 83.365,28.376 83.44,28.45 R7A.2
I1_OUT_P: J4.A7 R4A.2 | length 42.5
  Top Layer w0.127: J4.A7 52.298,17.671 52.298,20.739 52.913,21.354 82.638,21.354 82.984,21.7 82.984,28.376 82.91,28.45 R4A.2
I1_OUTPUT: J3.3 J3.4 U1A.8 U1A.9 U1A.10
I2_INPUT: J3.5 J3.6 U1B.1 U1B.2 U1B.3
I2_OUT_N: J4.A5 R7B.2 | length 18.7
  Top Layer w0.127: J4.A5 49.799,17.542 51.917,19.661 51.917,20.504 51.859,20.563 51.859,20.922 55.055,24.119 57.317,24.119 61.31,28.113 61.31,28.268 61.492,28.45 R7B.2
I2_OUT_P: J4.A4 R4B.2 | length 17.5
  Top Layer w0.127: J4.A4 49.377,21.1 51.321,21.1 51.357,21.065 51.462,21.065 54.898,24.5 57.159,24.5 60.929,28.27 60.929,28.376 60.855,28.45 R4B.2
I2_OUTPUT: J3.7 J3.8 U1B.8 U1B.9 U1B.10
I3_INPUT: J5.1 J5.2 U1C.1 U1C.2 U1C.3
I3_OUT_N: J4.A6 R7C.2 | length 19.9
  Top Layer w0.127: R7C.2 37.597,28.343 37.522,28.269 37.522,28.163 41.192,24.494 43.545,24.494 47.218,20.82 47.218,19.982 47.376,19.825 ccw(c48.36,20.082) 48.102,19.098 48.189,19.011 48.396,18.805 49.622,18.805 J4.A6
I3_OUT_P: J4.A3 R4C.2 | length 18.5
  Top Layer w0.127: R4C.2 37.067,28.343 37.141,28.269 37.141,28.006 41.034,24.113 43.387,24.113 46.837,20.662 46.837,20.034 46.837,19.998 46.837,19.824 ccw(c51.921,23.665) 47.417,19.159 ccw(c48.315,20.059) 47.548,19.045 48.017,18.575 48.017,18.47 J4.A3
I3_OUTPUT: J5.3 J5.4 U1C.8 U1C.9 U1C.10
I4_INPUT: J5.5 J5.6 U1D.1 U1D.2 U1D.3 | length 0.7
  Top Layer w0.254: J5.5@22.925,74.997 J5.5
I4_OUT_N: J4.A2 R7D.2 | length 39.7
  Top Layer w0.127: R7D.2 15.383,28.335 15.383,21.983 16.065,21.3 42.704,21.3 44.818,19.186 44.923,19.186 J4.A2
I4_OUT_P: J4.A1 R4D.2 | length 40.1
  Top Layer w0.127: R4D.2 14.846,28.335 15.002,28.179 15.002,21.825 15.908,20.919 42.546,20.919 44.55,18.915 J4.A1
I4_OUTPUT: J5.7 J5.8 U1D.8 U1D.9 U1D.10
NetC4A_1: C4A.1 R2A.1 R3A.1 | length 6.9
  Top Layer w0.254: C4A.1 81.087,42.175 81.125,42.212 ; R2A.1 80.4,44.149 80.549,44 80.976,44 81.125,43.851 81.125,42.212 ; R3A.1@81.125,40.225 81.125,42.212
NetC4B_1: C4B.1 R2B.1 R3B.1 | length 6.9
  Top Layer w0.254: C4B.1 59.137,42.175 59.175,42.212 ; R2B.1 58.45,44.149 58.599,44 59.026,44 59.175,43.851 59.175,42.212 ; R3B.1@59.175,40.225 59.175,42.212
NetC4C_1: C4C.1 R2C.1 R3C.1 | length 6.9
  Top Layer w0.254: C4C.1 35.244,42.068 35.282,42.105 ; R2C.1 34.557,44.042 34.706,43.893 35.133,43.893 35.282,43.744 35.282,42.105 ; R3C.1@35.282,40.118 35.282,42.105
NetC4D_1: C4D.1 R2D.1 R3D.1 | length 6.9
  Top Layer w0.254: C4D.1 13.03,42.06 13.068,42.098 ; R2D.1 12.343,44.034 12.492,43.885 12.919,43.885 13.068,43.736 13.068,42.098 ; R3D.1@13.068,40.11 13.068,42.098
NetC6A_2: C6A.2 U2A.2 | length 6.9
  Top Layer w0.254: C6A.2 78.6,30.6 v2(79.519,30.6) ; U2A.2 80.207,34.092 81.692,34.092 v2(81.7,34.1)
  Bottom Layer w0.254: v2(79.519,30.6) 81.7,32.781 v2(81.7,34.1)
NetC6B_2: C6B.2 U2B.2 | length 6.9
  Top Layer w0.254: C6B.2 56.65,30.6 v2(57.569,30.6) ; U2B.2 58.257,34.092 59.742,34.092 v2(59.75,34.1)
  Bottom Layer w0.254: v2(57.569,30.6) 59.75,32.781 v2(59.75,34.1)
NetC6C_2: C6C.2 U2C.2 | length 6.9
  Top Layer w0.254: C6C.2 32.757,30.493 v2(33.676,30.493) ; U2C.2 34.364,33.985 35.849,33.985 v2(35.857,33.993)
  Bottom Layer w0.254: v2(33.676,30.493) 35.857,32.674 v2(35.857,33.993)
NetC6D_2: C6D.2 U2D.2 | length 6.9
  Top Layer w0.254: C6D.2 10.543,30.485 v2(11.462,30.485) ; U2D.2 12.15,33.978 13.635,33.978 v2(13.643,33.985)
  Bottom Layer w0.254: v2(11.462,30.485) 13.643,32.666 v2(13.643,33.985)
NetC7A_1: C7A.1 C8A.2 R5A.2 R6A.1 | length 14.1
  Top Layer w0.254: R5A.2@82.3,45.2 82.3,43.175 ; 82.4,41.125 C8A.2 ; R6A.1 84.25,37.05 82.449,37.05 82.3,37.199 82.3,43.175 ; C7A.1 82.3,43.175
NetC7B_1: C7B.1 C8B.2 R5B.2 R6B.1 | length 14.1
  Top Layer w0.254: R5B.2@60.35,45.2 60.35,43.175 ; 60.45,41.125 C8B.2 ; R6B.1 62.3,37.05 60.499,37.05 60.35,37.199 60.35,43.175 ; C7B.1 60.35,43.175
NetC7C_1: C7C.1 C8C.2 R5C.2 R6C.1 | length 14.1
  Top Layer w0.254: R5C.2@36.457,45.093 36.457,43.068 ; 36.557,41.018 C8C.2 ; R6C.1 38.407,36.943 36.606,36.943 36.457,37.092 36.457,43.068 ; C7C.1 36.457,43.068
NetC7D_1: C7D.1 C8D.2 R5D.2 R6D.1 | length 14.1
  Top Layer w0.254: R5D.2@14.243,45.085 14.243,43.06 ; 14.343,41.01 C8D.2 ; R6D.1 16.193,36.935 14.392,36.935 14.243,37.084 14.243,38.885 14.243,43.06 ; C7D.1 14.243,43.06
NetR5A_1: R5A.1 U1A.12 | length 3.1
  Top Layer w0.254: U1A.12@82.247,49.615 82.247,46.577 R5A.1
NetR5B_1: R5B.1 U1B.12 | length 3.1
  Top Layer w0.254: U1B.12@60.297,49.615 60.297,46.577 R5B.1
NetR5C_1: R5C.1 U1C.12 | length 3.1
  Top Layer w0.254: U1C.12@36.404,49.508 36.404,46.47 R5C.1
NetR5D_1: R5D.1 U1D.12 | length 3.1
  Top Layer w0.254: U1D.12@14.19,49.5 14.19,46.463 R5D.1
OP_INA_N: C3A.2 R1A.1 R3A.2 U2A.1 | length 10
  Top Layer w0.254: R1A.1@76.375,34.25 76.382,34.257 76.382,35.132 76.605,35.355 78.025,35.355 ; C3A.2 78.025,35.355 ; R3A.2@81.125,38.975 81.125,37.35 80.2,36.425 U2A.1 78.025,35.355
OP_INA_P: C9A.2 R6A.2 R9A.1 U2A.8 | length 9.1
  Top Layer w0.254: R6A.2 86.962,37.125 87.075,37.012 87.075,35.355 ; U2A.8 87.075,35.355 ; C9A.2 88.375,35.355 ; R9A.1@89.975,34.325 89.975,35.206 89.826,35.355 88.375,35.355 ; 87.075,35.355 88.375,35.355
OP_INB_N: C3B.2 R1B.1 R3B.2 U2B.1 | length 10
  Top Layer w0.254: R1B.1@54.425,34.25 54.432,34.257 54.432,35.132 54.655,35.355 56.075,35.355 ; C3B.2 56.075,35.355 ; R3B.2@59.175,38.975 59.175,37.35 58.25,36.425 U2B.1 56.075,35.355
OP_INB_P: C9B.2 R6B.2 R9B.1 U2B.8 | length 9.1
  Top Layer w0.254: R6B.2 65.012,37.125 65.125,37.012 65.125,35.355 ; U2B.8 65.125,35.355 ; C9B.2 66.425,35.355 ; R9B.1@68.025,34.325 68.025,35.206 67.876,35.355 66.425,35.355 ; 65.125,35.355 66.425,35.355
OP_INC_N: C3C.2 R1C.1 R3C.2 U2C.1 | length 10
  Top Layer w0.254: R1C.1@30.532,34.143 30.539,34.15 30.539,35.025 30.762,35.248 32.182,35.248 ; C3C.2 32.182,35.248 ; R3C.2@35.282,38.868 35.282,37.243 34.357,36.318 U2C.1 32.182,35.248
OP_INC_P: C9C.2 R6C.2 R9C.1 U2C.8 | length 9.1
  Top Layer w0.254: R6C.2 41.119,37.018 41.232,36.905 41.232,35.248 ; U2C.8 41.232,35.248 ; C9C.2 42.532,35.248 ; R9C.1@44.132,34.218 44.132,35.099 43.983,35.248 42.532,35.248 ; 41.232,35.248 42.532,35.248
OP_IND_N: C3D.2 R1D.1 R3D.2 U2D.1 | length 10
  Top Layer w0.254: R1D.1@8.318,34.135 8.325,34.142 8.325,35.017 8.548,35.24 9.968,35.24 ; C3D.2 9.968,35.24 ; R3D.2@13.068,38.86 13.068,37.235 12.143,36.31 U2D.1 9.968,35.24
OP_IND_P: C9D.2 R6D.2 R9D.1 U2D.8 | length 9
  Top Layer w0.254: R6D.2@17.568,36.935 18.98,36.935 19.018,36.898 19.018,35.24 ; U2D.8 19.018,35.24 ; C9D.2 20.318,35.24 ; R9D.1@21.918,34.21 21.918,35.091 21.769,35.24 20.318,35.24 ; 19.018,35.24 20.318,35.24
OP_OUTA_N: C9A.1 R7A.1 R9A.2 U2A.5 | length 9
  Top Layer w0.254: R7A.1@86.225,28.475 86.2,28.5 U2A.5 88.35,31.545 ; C9A.1 88.375,31.57 88.35,31.545 ; R9A.2@89.975,32.575 89.975,31.694 89.826,31.545 88.35,31.545
OP_OUTA_P: C3A.1 R1A.2 R4A.1 U2A.4 | length 8.9
  Top Layer w0.254: R1A.2@76.425,32.487 76.425,31.694 76.574,31.545 78.075,31.545 ; C3A.1 78.025,31.595 78.075,31.545 ; R4A.1@80.2,28.475 U2A.4 78.075,31.545
OP_OUTB_N: C9B.1 R7B.1 R9B.2 U2B.5 | length 9
  Top Layer w0.254: R7B.1@64.275,28.475 64.25,28.5 U2B.5 66.4,31.545 ; C9B.1 66.425,31.57 66.4,31.545 ; R9B.2@68.025,32.575 68.025,31.694 67.876,31.545 66.4,31.545
OP_OUTB_P: C3B.1 R1B.2 R4B.1 U2B.4 | length 8.9
  Top Layer w0.254: R1B.2@54.475,32.487 54.475,31.694 54.624,31.545 56.125,31.545 ; C3B.1 56.075,31.595 56.125,31.545 ; R4B.1@58.25,28.475 U2B.4 56.125,31.545
OP_OUTC_N: C9C.1 R7C.1 R9C.2 U2C.5 | length 9
  Top Layer w0.254: R7C.1@40.382,28.368 40.357,28.393 U2C.5 42.507,31.438 ; C9C.1 42.532,31.463 42.507,31.438 ; R9C.2@44.132,32.468 44.132,31.587 43.983,31.438 42.507,31.438
OP_OUTC_P: C3C.1 R1C.2 R4C.1 U2C.4 | length 8.9
  Top Layer w0.254: R1C.2@30.582,32.38 30.582,31.587 30.731,31.438 32.232,31.438 ; C3C.1 32.182,31.488 32.232,31.438 ; R4C.1@34.357,28.368 U2C.4 32.232,31.438
OP_OUTD_N: C9D.1 R7D.1 R9D.2 U2D.5 | length 9
  Top Layer w0.254: R7D.1@18.168,28.36 18.143,28.385 U2D.5 20.293,31.43 ; C9D.1 20.318,31.455 20.293,31.43 ; R9D.2@21.918,32.46 21.918,31.579 21.769,31.43 20.293,31.43
OP_OUTD_P: C3D.1 R1D.2 R4D.1 U2D.4 | length 8.9
  Top Layer w0.254: R1D.2@8.368,32.372 8.368,31.579 8.517,31.43 10.018,31.43 ; C3D.1 9.968,31.48 10.018,31.43 ; R4D.1@12.143,28.36 U2D.4 10.018,31.43
V_RefA: R2A.2 U1A.11 | length 3.1
  Top Layer w0.254: U1A.11@80.343,49.615 80.343,46.607 R2A.2
V_RefB: R2B.2 U1B.11 | length 3.1
  Top Layer w0.254: U1B.11@58.393,49.615 58.393,46.607 R2B.2
V_RefC: R2C.2 U1C.11 | length 3.1
  Top Layer w0.254: U1C.11@34.5,49.508 34.5,46.5 R2C.2
V_RefD: R2D.2 U1D.11 | length 3.1
  Top Layer w0.254: U1D.11@12.286,49.5 12.286,46.492 R2D.2
pads on no net: J4.MH3 J4.MH4 MH1.1 MH2.1 MH3.1 MH4.1

## Polygon pours and split planes (outlines as drawn)
GND on Top Layer "GND_L01_P000" (solid, pour order 0): 1,0 1,51.5 97,51.5 97,0
I4_INPUT on Top Layer "I4_INPUT_L01_P023" (solid, pour order 23): 26,79 16,79 16,72.5 17,72.5 17,54 26,54
I2_OUTPUT on Top Layer "I2_OUTPUT_L01_P020" (solid, pour order 20): 62,89 51.5,89 51.5,54 59,54 59,82.5 62,82.5 62,83.5
I2_INPUT on Top Layer "I2_INPUT_L01_P019" (solid, pour order 19): 71.5,79 61.5,79 61.5,72.5 62.5,72.5 62.5,54 71.5,54
I1_OUTPUT on Top Layer "I1_OUTPUT_L01_P017" (solid, pour order 17): 81,82.448 81,53.948 72.855,53.948 72.855,82.448 71.855,82.448 71.855,88.948 82.5,88.948 82.5,82.448
I1_INPUT on Top Layer "I1_INPUT_L01_P015" (solid, pour order 15): 93,54 86,54 86,72 82.5,72 82.5,79 93,79
I4_OUTPUT on Top Layer "I4_OUTPUT_L01_P013" (solid, pour order 13): 16,89.5 5.5,89.5 5.5,54.5 13,54.5 13,83 16,83 16,84
I3_OUTPUT on Top Layer "I3_OUTPUT_L01_P009" (solid, pour order 9): 35.5,82.25 35.5,53.75 27.6,53.75 27.6,82.25 26.5,82.25 26.5,88.75 37,88.75 37,82.25
I3_INPUT on Top Layer "I3_INPUT_L01_P008" (solid, pour order 8): 47,54 40,54 40,72 36.5,72 36.5,79 47,79
GND on Bottom Layer "GND_L02_P001" (solid, pour order 1): 1,0 1,51.5 97,51.5 97,0
I3_OUTPUT on Bottom Layer "I3_OUTPUT_L02_P018" (solid, pour order 18): 35.51,82.25 35.51,53.75 27.51,53.75 27.51,82.25 26.51,82.25 26.51,88.75 37.01,88.75 37.01,82.25
I4_INPUT on Bottom Layer "I4_INPUT_L02_P024" (solid, pour order 24): 26,79 16,79 16,72.5 17,72.5 17,54 26,54
I4_OUTPUT on Bottom Layer "I4_OUTPUT_L02_P022" (solid, pour order 22): 16,89.5 5.5,89.5 5.5,54.5 13,54.5 13,83 16,83 16,84
I2_OUTPUT on Bottom Layer "I2_OUTPUT_L02_P007" (solid, pour order 7): 62,89 51.5,89 51.5,54 59,54 59,82.5 62,82.5 62,83.5
I2_INPUT on Bottom Layer "I2_INPUT_L02_P006" (solid, pour order 6): 71.5,79 61.5,79 61.5,72.5 62.5,72.5 62.5,54 71.5,54
I1_OUTPUT on Bottom Layer "I1_OUTPUT_L02_P005" (solid, pour order 5): 81,82.5 81,54 73,54 73,82.5 72,82.5 72,89 82.5,89 82.5,82.5
I3_INPUT on Bottom Layer "I3_INPUT_L02_P016" (solid, pour order 16): 47,54 40,54 40,72 36.5,72 36.5,79 47,79
I1_INPUT on Bottom Layer "I1_INPUT_L02_P003" (solid, pour order 3): 93,54 86,54 86,72 82.5,72 82.5,79 93,79

## Silkscreen, mask and mechanical layers (free items; w line width, h text height)
Top Overlay:
  text "L4" at 16.8,94.3 h1.3 r180
  text "L3" at 37.3,94.3 h1.3 r180
  text "L2" at 62.8,94.3 h1.3 r180
  text "L1" at 83.3,94.3 h1.3 r180
Mechanical 1:
  the board outline again, w0.1

## Text inside footprints (layer, text, board x,y; h text height)
J2: Top Overlay "+" at 80.6,4.267 h1 r180; Top Overlay "-" at 74.1,4.35 h1 r180
Serial1: Top Assembly "SerialNr" at 87.5,16.95 h0.7; Top Overlay "Serial-Nr." at 86.59,18.56 h1.5